# Altium PCB 三极管测试.PcbDoc
Units mil, origin at the board's own origin, x right, y up, seen from the top; angles counter-clockwise.
Board outline 6000 x 4000 mil, 2 copper layers (Top Layer, Bottom Layer); 9 components, 10 nets, 20 pads, 0 vias.
Unrouted connection lines stored in the file: 10.
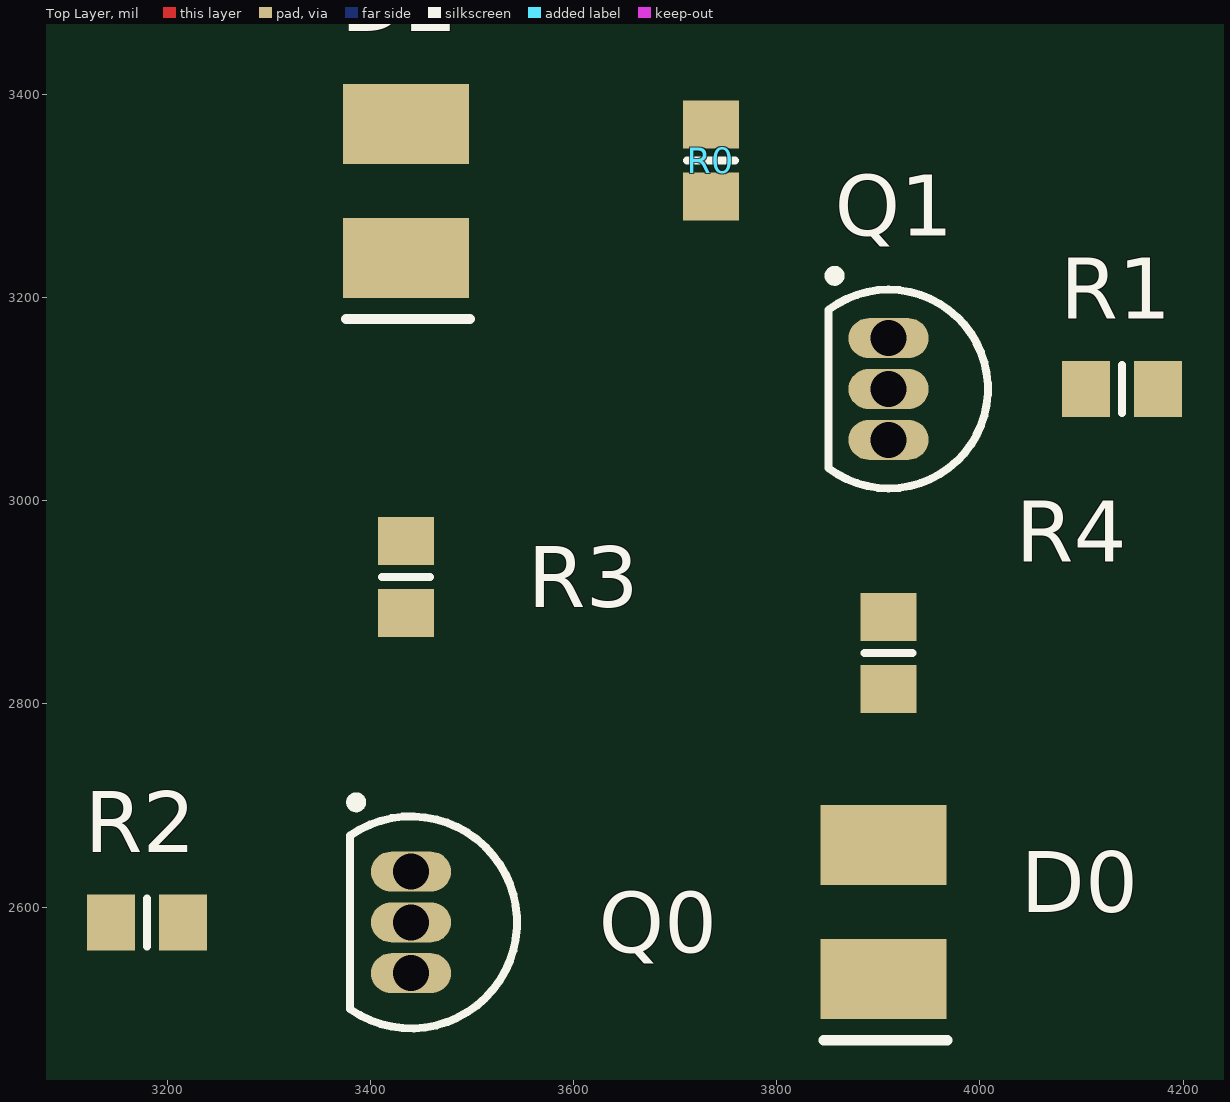
[diagram p0: Top Layer view]
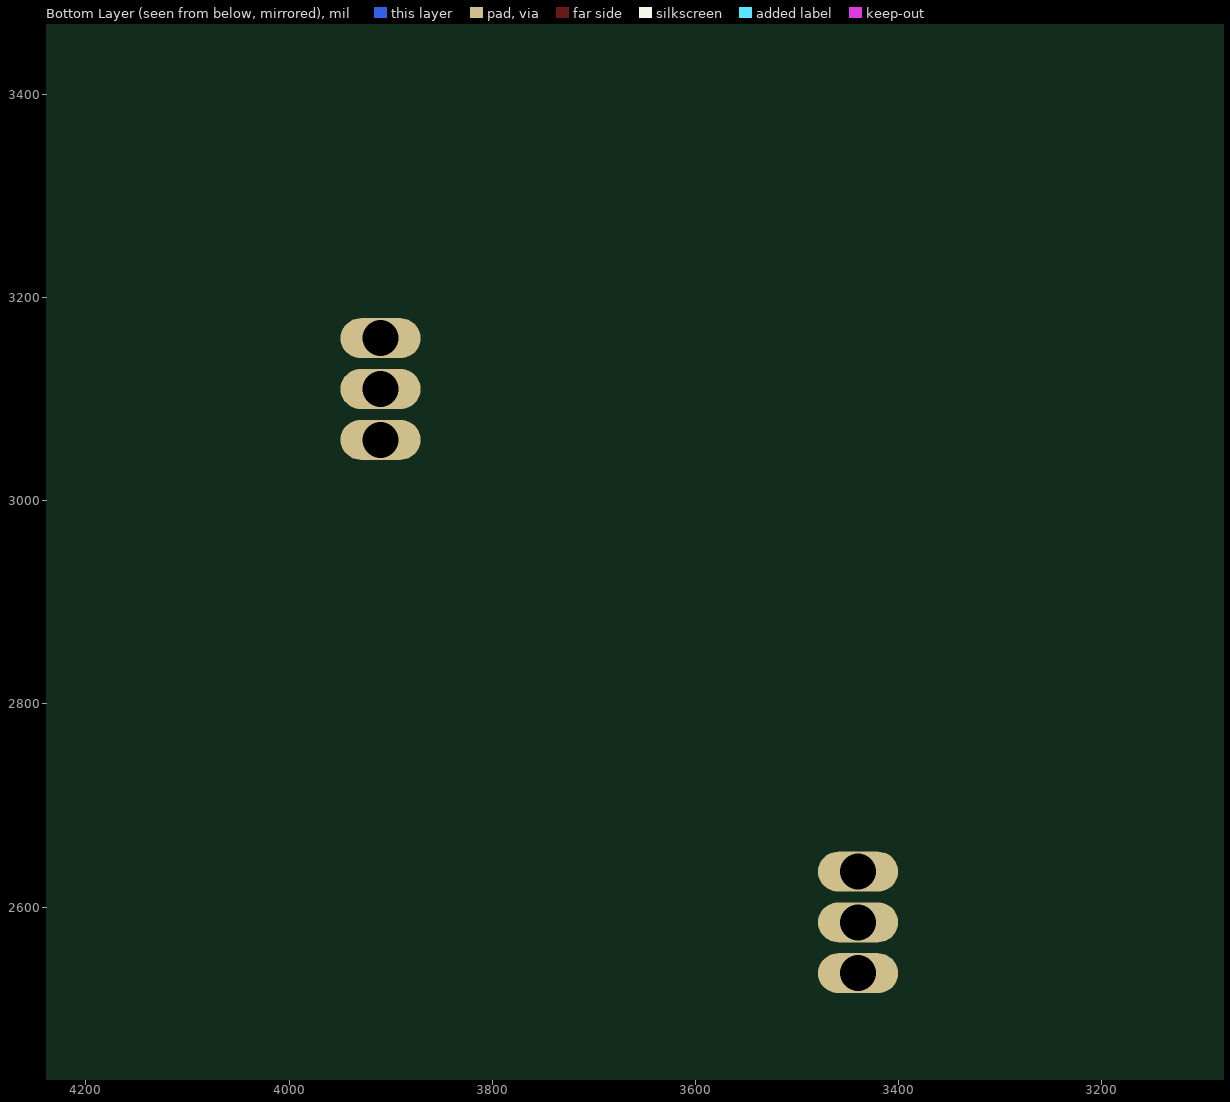
[diagram p1: Bottom Layer view, seen from below]

## Layer stack, top to bottom
Top Solder: solder mask 0.4, Solder Resist, Dk 3.5
Top Layer: signal copper 1.4
Dielectric 1: dielectric 12.6, FR-4, Dk 4.8
Bottom Layer: signal copper 1.4
Bottom Solder: solder mask 0.4, Solder Resist, Dk 3.5

## Board outline
1000,1000 7000,1000 7000,5000 1000,5000

## Design rules (kind name [scope] priority, off if disabled: settings)
Clearance [All] p1: gap=10
PolygonConnect [All] p1: connectstyle=Relief reliefconductorwidth=10 reliefentries=4 polygonreliefangle="90 Angle" airgapwidth=10
RoutingVias [All] p1: holewidth=28 width=50 viastyle="Through Hole" minholewidth=28 minwidth=50 maxholewidth=28 maxwidth=50
SolderMaskExpansion [All] p1: expansion=4
Width [All] p1: maxlimit=10 minlimit=10 preferedwidth=10
30 further rules are at their usual default settings.

## Components (designator, comment, footprint, x,y, rotation, side; value= is the part's Value field where it differs from the comment)
D0 "LED" LED_3528 3905,2595 r270 top
D2 "LED" LED_3528 3435,3305 r270 top
Q0 "9013" TO-226-AA 3440,2585 r180 top
Q1 "9012" TO-92A 3910,3110 r180 top
R0 "Res1" 6-0805_N 3735,3335 r90 top
R1 "Res1" 6-0805_N 4140,3110 r180 top
R2 "Res1" 6-0805_N 3180,2585 r0 top
R3 "Res1" 6-0805_N 3435,2925 r90 top
R4 "Res1" 6-0805_N 3910,2850 r90 top

## Footprints (in the part's own frame and the unit in brackets; to place one, negate y for a bottom-side part, rotate by r counter-clockwise, add the part's x,y. Pads: shape width x height; smd on the part's side, far side on the other; paste and mask are expansions set on the pad)
6-0805_N [mm] "Chip Resistor, Body 2.0x1.2mm, IPC Medium Density"
  rect 1.2x1.4 smd: 1(-0.9,0) 2(0.9,0)
  silkscreen extent 0,-0.6 0,0.6, body extent -1.07,-0.7 1.07,0.7, height 0.7
LED_3528 [mm] "Chip Diode, 2-Leads, Body 5.00x3.00mm, IPC Medium Density"
  rect 2x3.15 smd: 1(-1.675,0) 2(1.675,0)
  silkscreen extent 3.2,-1.5 3.2,1.6, body extent -2.5,-1.5 2.5,1.5, height 2
TO-92A [mm] "TO, Flat Index; 3 In-Line, Axial Leads; Body Dia. 4.5mm; Leads 0.51 x 0.48 mm (max)"
  oval 2x1 hole 0.9: 1(0,-1.27) 2(0,0) 3(0,1.27)
  silkscreen extent -2.48,-2.95 1.5,2.48, body extent -2.48,-2.5 1.5,2.5, height 6.86
TO-226-AA [mm] "TO, Flat Index; 3 In-Line, Axial Leads; Body Dia. 4.8mm; Leads 0.55 x 0.51 mm (max)"
  oval 2x1 hole 0.9: 1(0,-1.27) 2(0,0) 3(0,1.27)
  silkscreen extent -2.65,-3.13 1.52,2.65, body extent -2.65,-2.66 1.52,2.66, height 5.33

## Part data
Q0: library part NPN, "NPN Bipolar Transistor"
Q1: library part 2N3906, "PNP General Purpose Amplifier"
R0 R1 R2 R3 R4: "Resistor"

## Nets (pads, with @x,y where several pads share a name; then routed paths per layer and width w, separated by ;. In a path a pad name is that pad's centre, name@x,y a point inside that pad or via, vN(x,y) a via of type N, cw(c..) or ccw(c..) an arc to the next point about the centre after c; other vN are vias at no path point)
GND: D0.2 Q0.3
NetD0_1: D0.1 R4.1
NetD2_2: D2.2 R3.2
NetQ0_1: Q0.1 R3.1
NetQ0_2: Q0.2 R2.2
NetQ1_2: Q1.2 R0.1 R1.2
NetQ1_3: Q1.3 R4.2
NPN: R2.1
PNP: R1.1
VCC: D2.1 Q1.1 R0.2